# EAGLE board ppt4 (EAGLE 5.11)
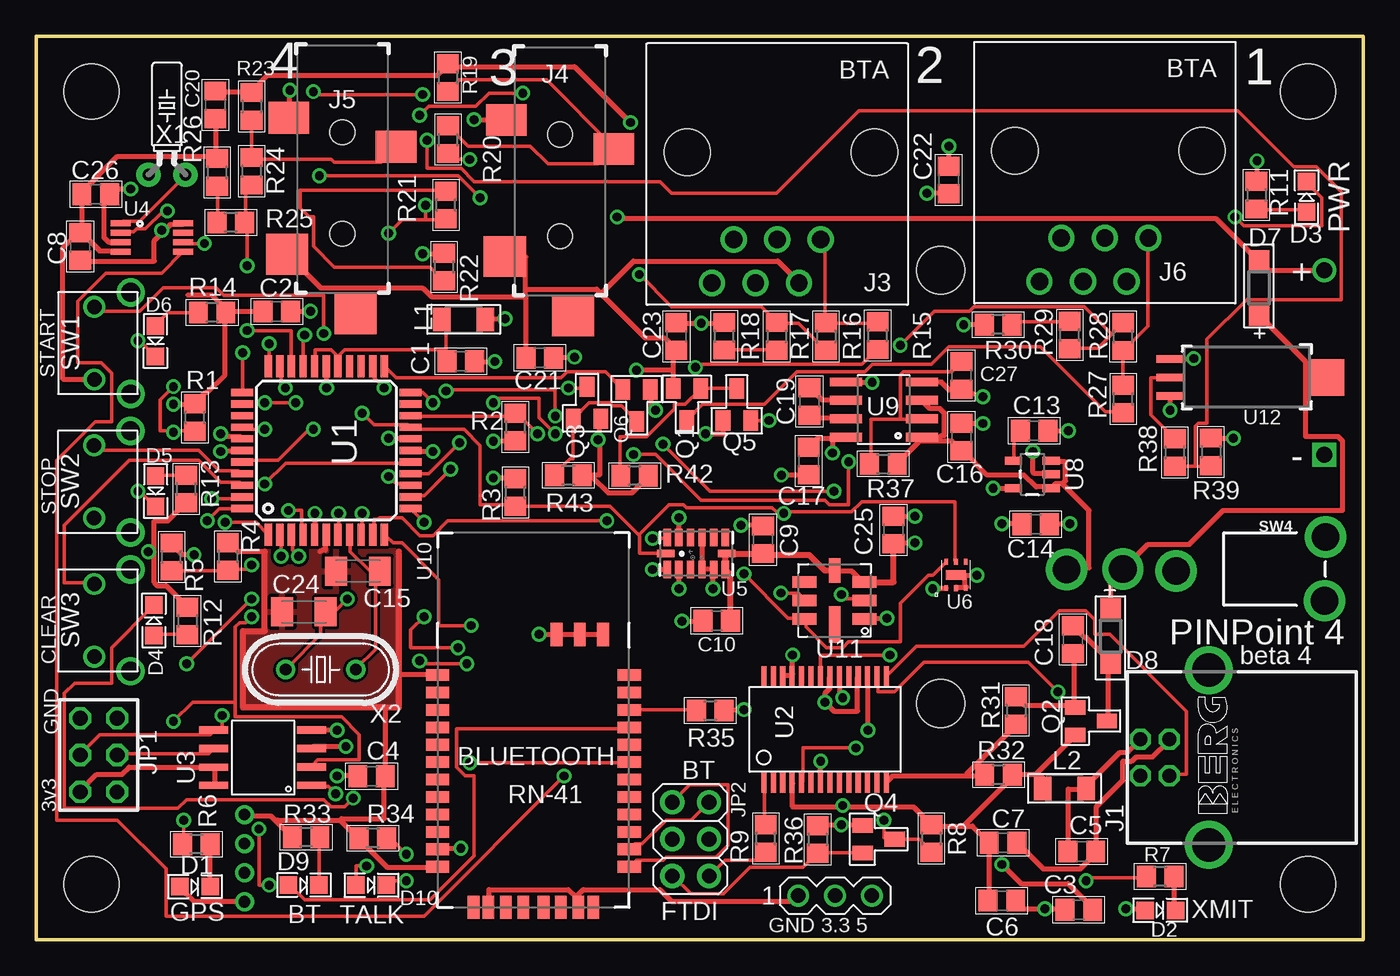
[diagram p0: board, top side]
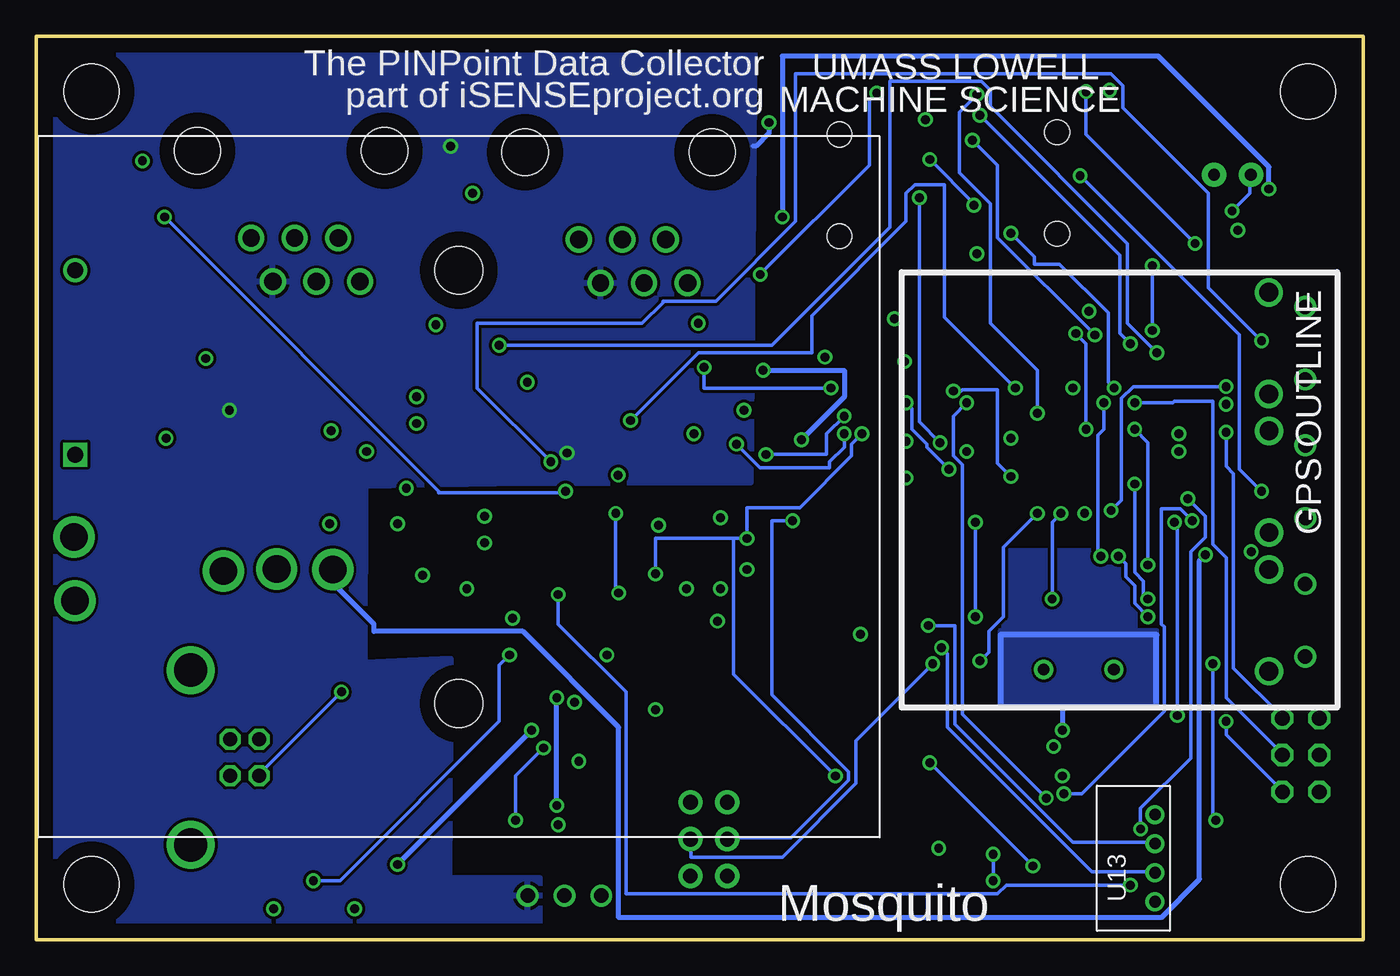
[diagram p1: board, bottom side, seen from below]

Size 91.44 x 62.23 mm. Coordinates in mm from the lower left corner, seen from the top.
Outline: 0,0 0,62.23 91.44,62.23 91.44,0 0,0
Copper layers (1*2+3*16): Top 0.035mm / dielectric 1.5mm / $gnd 0.035mm / dielectric 0.15mm / $+3v3 0.035mm / dielectric 0.2mm / Bottom 0.035mm
Design rules "default *": minimum track width 10mil, minimum drill 24mil, track to track 8mil, track to pad 8mil, pad to pad 8mil, via to via 8mil, smd to smd 8mil, copper to edge 40mil, drill to drill 8mil, minimum pad ring 10mil, minimum via ring 8mil, stop-mask expansion 4mil, vias tented up to drill 0mil, thermal gap 10mil
Net classes: 0 SIGNAL: width 0.203 mm, drill 0.203 mm, clearance 0.203 mm; 1 SUPPLY: width 0.356 mm, drill 0.203 mm, clearance 0.203 mm
Holes 3.81 mm at 3.81,3.81 3.81,58.42 87.63,3.81 87.63,58.42
tRestrict: area -0.2,-0.2 to 7.8,7.8; area -0.2,54.4 to 7.8,62.4; area 83.6,-0.2 to 91.6,7.8; area 83.6,54.4 to 91.6,62.4

## Footprints (pad centres in the part's own frame; a part is rotated, then mirrored left to right if it is on the bottom)
C0805 = smd 1.3 x 1.5: 1 -0.95,0; 2 0.95,0
C1206K = smd 1.5 x 2: 1 -1.5,0; 2 1.5,0
LED-0805 = smd 1.2 x 1.2: A 0,-1.05; C 0,1.05
SOD123 = smd 1.4 x 1.4: A 1.9,0; C -1.9,0
PN61729-S = drill 0.95 octagon: 1 1.25,4.71; 2 -1.25,4.71; 3 -1.25,2.71; 4 1.25,2.71 | drill 2.3 pad 2.9 round: S1 -6.02,0; S2 6.02,0
DY164 = drill 1.2 round: 1 4.5,3; 2 3,0; 3 1.5,3; 4 0,0; 5 -1.5,3; 6 -3,0 | hole 3.2: 6.2,-6; -6.7,-6
SJ-3534-SMT = smd 2.2 x 2.8: 1 0,-3.7; 3 2,3.7 | smd 2.8 x 2.9: 2 9.4,-3.8; 10 13.5,0.9 | hole 1.7: 1,0; 8,0
2464R = drill 1.1 square: NEG 26.42,2.225 | drill 1.1 round: POS 26.42,14.925 | hole 3.3: 0,14.925; 0,-14.925
AVR-ISP-6 = drill 1.016 octagon: 2 -2.54,1.27; 3 0,-1.27; 4 0,1.27; 5 2.54,-1.27; 6 2.54,1.27 | drill 1 octagon: P$1 -2.54,-1.27
2X03 = drill 1.016 pad 1.676 round: 2 -2.54,1.27; 3 0,-1.27; 4 0,1.27; 5 2.54,-1.27; 6 2.54,1.27 | drill 1 pad 1.676 round: P$2 -2.54,-1.27
L3216C = smd 1.2 x 1.6: 1 -1.5,0; 2 1.5,0
SUPER-SOT3 = smd 1 x 1.4: 1 -0.95,-1.1; 2 0.95,-1.1; 3 0,1.1
SOT23 = smd 1 x 1.4: 1 -0.95,-1.1; 2 0.95,-1.1; 3 0,1.1
R0805 = smd 1.3 x 1.5: 1 -0.95,0; 2 0.95,0
PTS635V = drill 1 round: 1 -2.5,0; 2 2.5,0 | drill 1.3 round: P$1 -3.5,2.5; P$2 3.5,2.5
102-1271-EV = drill 1.9 round: 1 -0.14,10.28; 2 0,13.96; 3 -0.03,17.82; P$1 2.2,0; P$2 -2.19,0.05
MA03-1 = drill 1 round: P$1 -2.54,0; P$2 0,0; P$3 2.54,0
TQFP44 = smd 1.5 x 0.5: 1 -5.8,4; 2 -5.8,3.2; 3 -5.8,2.4; 4 -5.8,1.6; 5 -5.8,0.8; 6 -5.8,0; 7 -5.8,-0.8; 8 -5.8,-1.6; 9 -5.8,-2.4; 10 -5.8,-3.2; 11 -5.8,-4; 23 5.8,-4; 24 5.8,-3.2; 25 5.8,-2.4; 26 5.8,-1.6; 27 5.8,-0.8; 28 5.8,0; 29 5.8,0.8; 30 5.8,1.6; 31 5.8,2.4; 32 5.8,3.2; 33 5.8,4 | smd 0.5 x 1.5: 12 -4,-5.8; 13 -3.2,-5.8; 14 -2.4,-5.8; 15 -1.6,-5.8; 16 -0.8,-5.8; 17 0,-5.8; 18 0.8,-5.8; 19 1.6,-5.8; 20 2.4,-5.8; 21 3.2,-5.8; 22 4,-5.8; 34 4,5.8; 35 3.2,5.8; 36 2.4,5.8; 37 1.6,5.8; 38 0.8,5.8; 39 0,5.8; 40 -0.8,5.8; 41 -1.6,5.8; 42 -2.4,5.8; 43 -3.2,5.8; 44 -4,5.8
SSOP28DB = smd 0.348 x 1.397: 1 -4.225,-3.656; 2 -3.575,-3.656; 3 -2.925,-3.656; 4 -2.275,-3.656; 5 -1.625,-3.656; 6 -0.975,-3.656; 7 -0.325,-3.656; 8 0.325,-3.656; 9 0.975,-3.656; 10 1.625,-3.656; 11 2.275,-3.656; 12 2.925,-3.656; 13 3.575,-3.656; 14 4.225,-3.656; 15 4.225,3.656; 16 3.575,3.656; 17 2.925,3.656; 18 2.275,3.656; 19 1.625,3.656; 20 0.975,3.656; 21 0.325,3.656; 22 -0.325,3.656; 23 -0.975,3.656; 24 -1.625,3.656; 25 -2.275,3.656; 26 -2.925,3.656; 27 -3.575,3.656; 28 -4.225,3.656
WSON = smd 2 x 0.5: CE# -3.29,1.595; HOLD# 3.46,0.345; SCK 3.46,-0.945; SI 3.46,-2.215; SO -3.29,0.325; VDD 3.46,1.595; VSS -3.29,-2.215; WP# -3.29,-0.945
UMAX-8 = smd 1.35 x 0.4: P$1 -2.15,0.975; P$2 -2.15,0.325; P$3 -2.15,-0.325; P$4 -2.15,-0.975; P$5 2.15,-0.975; P$6 2.15,-0.325; P$7 2.15,0.325; P$8 2.15,0.975
LGA14 = smd 0.5 x 1.2: 1 2,1.1; 2 1.2,1.1; 3 0.4,1.1; 4 -0.4,1.1; 5 -1.2,1.1; 6 -2,1.1; 8 -2,-1.1; 9 -1.2,-1.1; 10 -0.4,-1.1; 11 0.4,-1.1; 12 1.2,-1.1; 13 2,-1.1 | smd 1.2 x 0.5: 7 -2.1,0; 14 2.1,0
MAX44007 = smd 0.25 x 0.4: P1 -0.675,-0.9; P2 0,-0.925; P3 0.675,-0.9; P4 0.675,0.9; P5 0,0.9; P6 -0.675,0.9 | smd 1.35 x 0.65: PGND 0,0
SOT23-5 = smd 0.55 x 1.2: 1 -0.95,-1.3; 2 0,-1.3; 3 0.95,-1.3; 4 0.95,1.3; 5 -0.95,1.3
SO08 = smd 0.61 x 2.21: 1 -1.905,-2.616; 2 -0.635,-2.616; 3 0.635,-2.616; 4 1.905,-2.616; 5 1.905,2.616; 6 0.635,2.616; 7 -0.635,2.616; 8 -1.905,2.616
RN41 = smd 0.8 x 1.6: 1 -6.6,-6.6; 2 -5.4,-6.6; 3 -4.2,-6.6; 4 -3,-6.6; 5 -1.8,-6.6; 6 -0.6,-6.6; 7 0.6,-6.6; 8 1.8,-6.6; 9 3,-6.6; 10 4.2,-6.6; 11 5.4,-6.6; 12 6.6,-6.6; 13 6.6,6.6; 14 5.4,6.6; 15 4.2,6.6; 16 3,6.6; 17 1.8,6.6; 18 0.6,6.6; 19 -0.6,6.6; 20 -1.8,6.6; 21 -3,6.6; 22 -4.2,6.6; 23 -5.4,6.6; 24 -6.6,6.6 | smd 1.6 x 0.8: 25 -9.4,4.8; 26 -9.4,3.2; 27 -9.4,1.6; 28 9.4,3.1; 29 9.4,-3.1; 30 9.4,-4.122; 31 9.4,-1.9; 32 9.4,-0.7; 33 9.4,0.7; 34 9.4,1.9; 35 9.4,4.122
BMP085 = smd 1.67 x 0.8: 1 -2.065,1.27; 2 -2.065,0; 3 -2.065,-1.27; 5 2.065,-1.27; 6 2.065,0; 7 2.065,1.27 | smd 0.8 x 1.67: 4 0,-2.065 | smd 0.8 x 2.5: 8 0,1.65
HIH-4030 = smd 0.508 x 1.778: 1 -1.27,-5.08; 2 0,-5.08; 3 1.27,-5.08 | smd 2.54 x 2.286: NC 0,5.842
DF3A-4P-BACK = drill 0.8 round: P$1 3,0; P$2 1,0; P$3 -1,0; P$4 -3,0
TC26H = drill 0.813 pad 1.676 round: 1 -1.27,0; 2 1.27,0
HC49U-V = drill 0.813 round: 1 -2.413,0; 2 2.413,0

## Placement (x,y rotation side)
C1  0.1uF  [C0805]  29.26,39.84 0 top
C2  0.1uF  [C0805]  16.58,43.27 0 top
C3  0.1uF  [C0805]  71.84,2.07 180 top
C4  0.1uF  [C0805]  23.11,11.25 0 top
C5  0.01uF  [C0805]  72.05,6.07 0 top
C6  4.7uF C0805C475K9PACTU  [C0805]  66.54,2.69 0 top
C7  0.1uF  [C0805]  66.62,6.68 0 top
C8  0.1uF  [C0805]  3.03,47.75 90 top
C9  1uF  [C0805]  50.08,27.55 90 top
C10  0.1uF  [C0805]  46.9,21.96 180 top
C13  470pF  [C0805]  68.76,35.06 0 top
C14  2.2uF C0805C225Z4VACTU  [C0805]  68.87,28.61 0 top
C15  18pF  [C1206K]  22.17,25.39 180 top
C16  1uF  [C0805]  63.75,34.62 90 top
C17  2.2uF C0805C225Z4VACTU  [C0805]  53.23,32.98 270 top
C18  1uF  [C0805]  71.43,20.66 90 top
C19  0.47uF  [C0805]  53.27,37.07 90 top
C20  0.1uF  [C0805]  12.34,57.51 270 top
C21  0.1uF  [C0805]  34.7,40.08 0 top
C22  0.1uF  [C0805]  62.88,52.33 270 top
C23  0.1uF  [C0805]  44.11,41.55 90 top
C24  18pF  [C1206K]  18.44,22.58 180 top
C25  0.1uF  [C0805]  59.07,28.23 90 top
C26  10uF  [C0805]  4.1,51.34 180 top
C27  2.2uF  [C0805]  63.75,38.88 270 top
D1  GREEN 2 mA 0805  [LED-0805]  10.94,3.65 270 top
D2  YELLOW 2 mA 0805  [LED-0805]  77.45,2.02 270 top
D3  GREEN 2 mA 0805  [LED-0805]  87.54,51.17 0 top
D4  RED 2 mA 0805  [LED-0805]  8.1,22 0 top
D5  YELLOW 2 mA 0805  [LED-0805]  8.23,30.89 180 top
D6  GREEN 2 mA 0805  [LED-0805]  8.21,41.22 180 top
D7  MBR0520L  [SOD123]  84.25,44.91 90 top
D8  MBR0520L  [SOD123]  74.03,20.91 270 top
D9  YELLOW 2 mA 0805  [LED-0805]  18.43,3.76 270 top
D10  GREEN 2 mA 0805  [LED-0805]  23.08,3.75 270 top
J1  Digikey WM17113-ND  [PN61729-S]  80.8,12.55 90 top
J3  BTA  [DY164]  51.06,48.23 180 top
J4  SJ-3524-SMT  [SJ-3534-SMT]  36.08,56.46 270 top
J5  SJ-3524-SMT  [SJ-3534-SMT]  21.1,56.62 270 top
J6  BTA  [DY164]  73.63,48.34 180 top
J7  2464  [2464R]  62.33,31.19 0 top
JP1  AVR-ISP-6  [AVR-ISP-6]  4.3,12.72 90 top
JP2  [2X03]  45.09,6.93 90 top
L1  10uH CBC3225T100MR 1210 pkg  [L3216C]  29.45,42.73 180 top
L2  10uH CBC3225T100MR 1210 pkg  [L3216C]  70.86,10.42 0 top
Q1  NDS332P  [SUPER-SOT3]  44.84,36.87 180 top
Q2  NDS332P  [SUPER-SOT3]  72.68,15.06 270 top
Q3  NDS332P  [SUPER-SOT3]  37.95,36.98 0 top
Q4  BSS128  [SOT23]  58.05,6.92 270 top
Q5  BSS123  [SOT23]  48.27,36.87 0 top
Q6  BSS123  [SOT23]  41.37,36.81 180 top
R1  10K  [R0805]  10.94,35.97 90 top
R2  10K  [R0805]  33.01,35.31 270 top
R3  10K  [R0805]  33.02,30.81 90 top
R4  47K  [R0805]  13.21,26.4 270 top
R5  47K  [R0805]  9.32,26.37 90 top
R6  1K  [R0805]  11.03,6.57 180 top
R7  1K  [R0805]  77.43,4.35 180 top
R8  10K  [R0805]  61.68,6.97 270 top
R9  10K  [R0805]  50.27,6.97 90 top
R11  1K  [R0805]  84.08,51.28 270 top
R12  1K  [R0805]  10.42,21.95 270 top
R13  1K  [R0805]  10.34,31.04 90 top
R14  1K  [R0805]  12.12,43.2 180 top
R15  47K  [R0805]  57.98,41.61 90 top
R16  47K  [R0805]  54.42,41.55 270 top
R17  47K  [R0805]  51.02,41.56 270 top
R18  47K  [R0805]  47.41,41.57 90 top
R19  47K  [R0805]  28.36,59.38 270 top
R20  47K  [R0805]  28.37,55.11 270 top
R21  47K  [R0805]  28.23,50.61 90 top
R22  47K  [R0805]  28.11,46.33 90 top
R23  47K  [R0805]  14.85,57.41 270 top
R24  47K  [R0805]  14.84,52.93 270 top
R25  47K  [R0805]  13.42,49.4 180 top
R26  47K  [R0805]  12.47,52.86 90 top
R27  47K  [R0805]  74.9,37.24 90 top
R28  47K  [R0805]  74.89,41.54 90 top
R29  47K  [R0805]  71.21,41.65 90 top
R30  47K  [R0805]  66.28,42.36 180 top
R31  1K  [R0805]  67.51,15.78 270 top
R32  10K  [R0805]  66.3,11.36 180 top
R33  1K  [R0805]  18.6,7.06 180 top
R34  1K  [R0805]  23.18,6.99 180 top
R35  10K  [R0805]  46.44,15.79 0 top
R36  10K  [R0805]  53.85,6.91 270 top
R37  100K  [R0805]  58.37,32.77 0 top
R38  P12.0KCCT-ND  [R0805]  78.46,33.56 90 top
R39  P68.0KCCT-ND  [R0805]  80.95,33.61 270 top
R42  10K  [R0805]  41.23,31.96 180 top
R43  10K  [R0805]  36.65,31.99 180 top
SW1  PTS635V  [PTS635V]  4,41.09 270 top
SW2  PTS635V  [PTS635V]  3.99,31.55 270 top
SW3  PTS635V  [PTS635V]  4,22 270 top
SW4  EG2480  [102-1271-EV]  88.83,25.53 90 top
TP1  [MA03-1]  55.04,3.03 0 top
U1  ATMEGA324PV-10AU  [TQFP44]  19.99,33.7 90 top
U2  FT232RL  [SSOP28DB]  54.36,14.48 0 top
U3  SST25VF016BTRUE  [WSON]  15.7,12.23 180 top
U4  DS1340U-33+  [UMAX-8]  7.97,48.37 0 top
U5  ADXL345  [LGA14]  45.48,26.6 180 top
U6  MAX44007  [MAX44007]  63.38,25.12 0 top
U8  MIC5205-3.3YM5  [SOT23-5]  68.63,32.06 90 top
U9  MAX682  [SO08]  58.4,36.52 90 top
U10  BLUETOOTH-RN41"  [RN41]  34.26,11.63 270 top
U11  BMP085  [BMP085]  55.01,23.37 180 top
U12  HIH-4031SMD  [HIH-4030]  83.16,38.72 270 top
U13  LS20031  [DF3A-4P-BACK]  14.34,5.61 270 top
X1  32.768 kHz 12.5 pF X1123-ND  [TC26H]  9.01,52.69 0 top
X2  9.216 MHZ 18PF  [HC49U-V]  19.61,18.61 180 top

## Library data of the parts
C1-C10 C13-C27 L1 L2 R1-R9 R11-R39 R42 R43 = rcl
D1-D6 D9 D10 JP1 SW1-SW4 U3 U13 = machine_science
D7 D8 = diode
J1 = con-berg
J3-J7 U6 = machine_science2
JP2 = pinhead
Q1-Q3 = transistor-power
Q4-Q6 = transistor-small-signal
TP1 = con-lstb
U1 = atmel
U2 = SparkFunEagle-6-6-07
U4 U5 U8 U10 X1 = SparkFun
U9 = max682
U11 U12 = SparkFun-20100301
X2 = crystal

## Nets
+3V3 [SUPPLY]: C2.1 C4.1 C8.1 C9.1 C10.1 C14.1 C25.1 D1.A D2.A JP1.2 L1.1 Q4.1 Q5.1 Q6.1 R1.2 R2.2 R3.2 R11.1 R12.1 R13.1 R14.1 R36.1 TP1.P$2 U1.5 U1.17 U1.38 U3.HOLD# U3.VDD U3.WP# U4.P$8 U5.1 U5.6 U5.7 U6.P1 U8.5 U10.11 U11.3 U11.4 U13.P$1
+5V [SUPPLY]: C17.1 C20.1 C21.1 C22.1 C23.1 J3.5 J4.2 J5.2 J6.5 Q1.2 Q3.2 R19.1 R23.1 R42.1 R43.1 TP1.P$3 U9.8 U12.3
ADX1: R28.2 R29.1 U1.34
ADX1-PULLUP: Q5.2 U1.24
ADX2: R16.2 R17.1 U1.33
ADX2-PULLUP: Q6.2 U1.23
ADX3: R20.2 R21.1 U1.32
ADX4: R24.2 R25.1 U1.31
ATM-RX0: JP2.3 U1.9
ATM-TX0: JP2.4 U1.10
BATT-LED: D3.C U1.13
CLEAR-BUTTON: SW3.1 U1.42
CLEAR-LED: D4.C U1.22
CS: U1.44 U3.CE#
EOC: U1.43 U11.2
FTDI-RX: JP2.2 Q4.2 R36.2
FTDI-TX: JP2.P$2 R9.1
FTDI-VCC [SUPPLY]: C6.1 C7.1 L2.1 Q2.2 R8.1 R32.1 U2.4 U2.20
GND [SUPPLY]: C1.2 C2.2 C3.2 C4.2 C5.2 C6.2 C7.2 C8.2 C9.2 C10.2 C13.2 C14.2 C15.2 C16.2 C17.2 C20.2 C21.2 C22.2 C23.2 C24.2 C25.2 C26.2 C27.2 J1.4 J3.2 J4.1 J5.1 J6.2 J7.NEG JP1.6 R4.1 R18.2 R22.2 R26.2 R30.2 R33.2 R34.2 R35.2 R39.1 SW1.2 SW2.2 SW3.2 TP1.P$1 U1.6 U1.18 U1.28 U1.39 U2.7 U2.18 U2.21 U2.25 U2.26 U3.VSS U4.P$4 U5.2 U5.4 U5.5 U5.10 U5.12 U6.P2 U6.P3 U6.PGND U8.2 U9.4 U9.5 U10.1 U10.12 U10.25 U10.26 U10.27 U10.28 U10.29 U11.1 U12.1 U13.P$4
GPS-LED: R6.2 U1.16
HUMIDITY: R38.1 R39.2 U1.30
MISO: JP1.P$1 U1.2 U3.SO
MOSI: JP1.4 U1.1 U3.SI
N$1: J1.2 U2.16
N$2: J1.3 U2.15
N$3: C1.1 L1.2 U1.27 U1.29
N$4: R38.2 U12.2
N$5: D9.C R33.1
N$6: D3.A R11.2
N$7 [SUPPLY]: C5.1 J1.1 L2.2
N$8 [SUPPLY]: D1.C R6.1
N$9: R7.2 U2.22
N$10 [SUPPLY]: D2.C R7.1
N$11: Q4.3 R8.2 U2.5
N$12: R9.2 U2.1
N$13 [SUPPLY]: C3.1 U2.17
N$14: U4.P$1 X1.2
N$15: U4.P$2 X1.1
N$16: D4.A R12.2
N$17: D5.A R13.2
N$18: D6.A R14.2
N$19: J3.6 R15.2 R16.1
N$20: J6.6 R27.2 R28.1
N$21: R17.2 R18.1
N$22: J4.3 R19.2 R20.1
N$23: R29.2 R30.1
N$24: R21.2 R22.1
N$25: J5.3 R23.2 R24.1
N$26: C13.1 U8.4
N$27: R25.2 R26.1
N$28 [SUPPLY]: C19.1 U9.7
N$29 [SUPPLY]: C18.1 Q2.1 R31.1
N$30 [SUPPLY]: C19.2 U9.6
N$31 [SUPPLY]: C18.2 D8.A Q2.3
N$32: Q1.3 R27.1
N$33: C24.1 U1.7 X2.2
N$34: C27.1 R37.1 U9.2
N$35: C15.1 U1.8 X2.1
N$36: D9.A U10.21
N$37: D10.C R34.1
N$38: D10.A U10.19
N$39: R35.1 U10.22
N$40: Q1.1 Q5.3 R42.2
N$41: Q3.3 R15.1
N$42: Q3.1 Q6.3 R43.2
PWREN~ [SUPPLY]: R31.2 R32.2 U2.14
RST: JP1.5 R1.1 U1.4
RX1: U1.11 U13.P$3
RX-BT: JP2.5 U10.14
SCK: JP1.3 U1.3 U3.SCK
SCL: R3.1 U1.19 U4.P$6 U5.14 U6.P5 U11.6
SDA: R2.1 U1.20 U4.P$5 U5.13 U6.P6 U11.7
START-BUTTON: SW1.1 U1.40
START-LED: D6.C U1.14
STOP-BUTTON: SW2.1 U1.41
STOP-LED: D5.C U1.15
TX1: U1.12 U13.P$2
TX-BT: JP2.6 U10.13
UNSWPWR [SUPPLY]: D7.C D8.C SW4.2
VBATT [SUPPLY]: C26.1 D7.A J7.POS U4.P$3
VINPUT [SUPPLY]: C16.1 R5.2 R37.2 SW4.3 U8.1 U8.3 U9.1 U9.3
VOLT: R4.2 R5.1 U1.37

## Tracks (layer width: path | path; a pad name or v marks a point on that pad's centre or on a via)
+3V3  (via drill 0.61)
  Top 0.356: 8.74,48.77 8.13,48.16 8.13,46.74 3.05,46.74 C8.1 | 8.74,48.77 9.25,49.28 10.06,49.28 U4.P$8 | R14.1 13.01,43.18 13.01,38.91 11.79,37.69 11.68,37.69 10.97,36.98 R1.2 10.77,36.88 v9.45,36.88 | C2.1 15.54,43.28 13.21,43.28 R14.1 | 10.46,44.4 12.09,44.4 13.11,43.38 R14.1 | 8.13,26.72 8.13,28.85 9.04,28.85 10.26,30.07 R13.1 | 8.13,26.72 8.13,24.59 8.33,24.38 8.94,24.38 10.36,22.96 R12.1 | Q4.1 56.9,7.92 v55.47,7.92 53.95,7.92 R36.1 | U3.VDD 12.29,10.67 12.29,11.79 U3.HOLD# 12.09,11.89 6.4,11.89 5.89,11.38 4.17,11.38 3.05,10.26 JP1.2 | D1.A 9.96,3.56 10.87,2.64 14.33,2.64 U13.P$1 | v75.08,2.13 76.2,2.13 76.3,2.03 D2.A | v20.73,11.28 22.15,11.28 C4.1 | v12.7,34.85 12.9,34.65 14.02,34.65 14.12,34.54 U1.38 | v84.12,53.65 84.12,52.32 R11.1 | v29.26,6.3 27.74,6.3 U10.11 | v21.34,13.31 19.1,13.31 19,13.21 U3.WP# | 8.13,26.72 v7.72,26.72 | 8.74,48.77 v8.64,48.87 | v65.94,31.09 67.26,31.09 U8.5 | v32.31,42.77 30.99,42.77 L1.1 | v42.67,36.47 42.47,36.68 42.37,36.68 42.37,37.9 Q6.1 | v46.13,34.85 47.35,34.85 47.35,35.76 Q5.1 | v27.33,33.63 25.81,33.63 U1.17 | v19.2,29.36 19.2,27.94 U1.5 | v31.5,31.8 32.92,31.8 R3.2 | v31.5,34.34 32.92,34.34 R2.2 | v61.77,24.18 62.69,24.18 U6.P1 | v66.55,28.65 67.87,28.65 C14.1 | U11.3 56.9,24.69 56.19,25.4 55.17,25.4 U11.4 | v42.47,25.5 43.38,25.5 U5.1 | v60.55,27.33 59.23,27.33 C25.1
  Top 0.406: U11.3 59.07,24.64 C25.1 | U11.4 54.32,25.43 53.25,26.5 50.18,26.5 C9.1 U5.7 47.48,26.5 U5.6 47.84,25.13 C10.1
+5V  (via drill 0.61)
  Top 0.356: C20.1 12.39,58.42 14.83,58.42 R23.1 14.94,58.52 15.95,59.54 27.64,59.54 28.35,60.25 R19.1 28.45,60.15 37.08,60.15 v40.95,56.29 | 33.73,44.81 33.73,47.04 32.31,47.04 J4.2 | 33.73,44.3 33.73,44.81 | 33.73,44.3 33.73,40.13 C21.1 | 38.91,44.5 38.61,44.81 33.73,44.81 | 38.91,44.5 41.96,41.45 43.28,41.45 44.09,40.64 C23.1 43.89,40.64 43.89,39.22 | J5.2 17.37,47.14 19.61,44.91 26.62,44.91 27.23,44.3 33.73,44.3 | C17.1 53.85,34.54 55.78,34.54 U9.8 54.86,34.44 v54.86,33.53 | v62.89,54.66 62.89,53.34 C22.1 | v78.13,36.47 78.13,37.39 U12.3 | 38.91,44.5 41.15,46.74 51.1,46.74 52.53,45.31 J3.5 | 43.89,39.22 43.89,38 Q1.2 | 38.81,34.44 38.81,32 38.3,32 | 38.81,34.44 38.81,35.87 Q3.2 | 38.3,32 37.69,32 R43.1 | R42.1 42.16,31.9 41.05,30.79 39.42,30.79 38.3,31.9 38.3,32 | 43.89,39.22 v41.35,39.22 | v38.71,34.44 38.81,34.44
  Bottom 0.356: v40.95,56.29 40.95,55.58 41.86,54.66 42.03,54.66 | v41.35,39.22 35.76,39.22 35.76,37.39 v38.71,34.44
  pour Bottom: 41.96,62.24 42.21,31.48 59.88,31.41 68.78,31.24 68.81,19.13 62.9,19.38 63,4.25 56.75,4.25 56.75,0 91.26,0 91.26,62.24
ADX1  (via drill 0.61)
  Top 0.254: 74.12,41.71 73.15,40.74 71.32,40.74 R29.1 | 74.12,41.71 74.88,42.47 R28.2 | v14.22,40.44 14.22,37.8 U1.34 | v59.54,40.95 61.87,43.28 64.31,43.28 64.62,43.59 72.24,43.59 74.12,41.71
  Bottom 0.254: v14.22,40.44 16.26,42.47 16.26,47.95 25.7,57.4 25.7,58.52 26.31,59.13 32.61,59.13 32.61,49.07 40.74,40.95 v59.54,40.95
ADX1-PULLUP  (via drill 0.61)
  Top 0.254: v50.49,35.76 49.28,35.76 Q5.2 | v23.98,38 23.27,38.71 23.27,39.42 U1.24
  Bottom 0.254: v50.49,35.76 45.82,40.44 38,40.44 38,42.98 31.5,49.48 31.5,51.41 30.89,52.02 28.85,52.02 28.85,42.88 v23.98,38
ADX2  (via drill 0.61)
  Top 0.254: v16.05,41.05 16.05,39.52 U1.33 | v26.42,56.79 27.03,57.4 30.28,57.4 31.19,58.32 v33.53,58.32 | v41.55,45.82 43.79,43.59 49.99,43.59 51,42.57 R17.1 51.1,42.47 52.53,42.47 54.36,40.64 R16.2
  Bottom 0.254: v16.05,41.05 16.76,41.76 16.76,47.14 v26.42,56.79 | v33.53,58.32 34.04,57.81 34.04,53.34 v41.55,45.82
ADX2-PULLUP
  Top 0.254: Q6.2 40.34,38 39.22,39.12 36.58,39.12 36.17,38.71 24.79,38.71 24.08,39.42 U1.23
ADX3  (via drill 0.61)
  Top 0.254: v17.17,38 16.87,38 16.87,39.42 U1.32 | v24.28,48.67 25.2,49.58 26.82,49.58 | 26.82,49.58 28.14,49.58 R21.1 | v29.87,53.75 28.85,53.75 28.45,54.15 R20.2 | 26.82,49.58 v26.82,50.6
  Bottom 0.254: v17.17,38 17.58,38.41 17.58,43.18 20.93,46.53 22.66,46.53 22.66,47.04 v24.28,48.67 | v29.87,53.75 26.82,50.7 v26.82,50.6
ADX4  (via drill 0.61)
  Top 0.254: R24.2 14.83,51.92 14.43,51.92 14.43,49.48 R25.1 14.33,49.28 14.53,49.28 v14.53,46.43 | v14.53,41.96 17.58,41.96 17.58,39.52 U1.31
  Bottom 0.254: v14.53,41.96 v14.53,46.43
ATM-RX0  (via drill 0.61)
  Top 0.254: v22.45,29.36 22.45,27.94 U1.9 | v26.42,19.2 26.62,19 v29.67,19
  Bottom 0.254: v22.45,29.36 24.79,27.03 24.79,22.25 25.81,21.23 25.81,19.81 v26.42,19.2 | v29.67,19 34.95,13.72 34.95,10.77 40.03,5.69 46.33,5.69 46.33,6.91 JP2.3
ATM-TX0  (via drill 0.61)
  Top 0.254: v39.32,28.85 28.35,28.85 27.33,27.84 26.42,27.84 25.2,29.06 23.67,29.06 23.57,28.96 23.27,28.96 23.27,27.94 U1.10
  Bottom 0.254: v39.32,28.85 40.74,28.85 40.74,16.87 35.46,11.58 35.46,10.97 39.42,7.01 43.79,7.01 JP2.4
BATT-LED  (via drill 0.61)
  Top 0.254: v82.6,49.78 83.21,49.17 88.59,49.17 88.59,51.1 87.58,52.12 D3.C | v54.97,30.89 46.43,30.89 v43.18,34.14 | v35.76,34.85 34.65,35.97 34.65,37.29 31.8,37.29 v31.5,36.98 | v28.55,32.41 26.72,30.58 25.81,30.58 U1.13
  Bottom 0.254: v54.97,30.89 54.97,30.79 63.7,30.79 63.7,30.89 v82.6,49.78 | v43.18,34.14 41.55,32.51 36.78,32.51 36.78,32.92 35.76,33.93 v35.76,34.85 | v31.5,36.98 31.09,36.58 31.09,35.15 30.07,34.14 30.07,33.93 v28.55,32.41
CLEAR-BUTTON
  Top 0.254: U1.42 14.12,31.39 14.02,31.5 12.7,31.5 11.18,33.02 6.4,33.02 1.93,28.55 1.93,24.59 3.96,24.59 SW3.1
CLEAR-LED  (via drill 0.61)
  Top 0.254: v21.84,9.75 21.23,9.14 20.32,9.14 19.81,9.65 10.36,9.65 9.75,9.04 1.93,9.04 1.93,16.97 2.64,17.68 5.18,17.68 5.18,20.12 8.03,22.96 D4.C | v27.33,36.98 26.62,37.69 25.81,37.69 U1.22
  Bottom 0.254: v21.84,9.75 27.64,15.54 27.64,32.72 28.25,33.33 28.25,36.07 v27.33,36.98
CS  (via drill 0.61)
  Top 0.254: v11.79,28.85 12.6,29.67 14.12,29.67 U1.44 | v20.62,10.06 20.12,10.57 19,10.57 U3.CE#
  Bottom 0.254: v11.79,28.85 12.6,29.67 13.92,29.67 13.92,21.74 13.72,21.54 13.72,15.75 19.41,10.06 v20.62,10.06
EOC  (via drill 0.61)
  Top 0.254: v12.09,30.38 14.02,30.38 14.12,30.48 U1.43 | v15.34,7.62 15.34,3.76 v16.05,3.76 | v55.47,23.77 55.78,23.47 57,23.47 U11.2
  Bottom 0.254: v12.09,30.38 10.87,29.16 10.87,27.74 11.89,26.72 11.89,12.5 15.34,9.04 v15.34,7.62 | v16.05,3.76 24.59,3.76 25.2,3.15 50.8,3.15 50.8,17.07 55.47,21.74 v55.47,23.77
FTDI-RX
  Top 0.254: Q4.2 56.9,5.99 53.95,5.99 R36.2 53.75,5.89 52.83,4.98 49.17,4.98 47.35,3.15 45.11,3.15 43.89,4.37 JP2.2
FTDI-TX
  Top 0.254: R9.1 50.19,5.99 49.68,5.49 47.45,5.49 46.43,4.47 JP2.P$2
FTDI-VCC  (via drill 0.61)
  Top 0.356: 68.89,11.38 71.53,14.02 Q2.2 | 68.89,11.38 67.26,11.38 R32.1 67.26,11.18 64.01,7.92 64.01,7.82 | L2.1 69.29,10.46 69.29,11.28 68.99,11.28 68.89,11.38 | C6.1 65.63,2.74 65.63,6.6 C7.1 65.53,6.81 64.52,7.82 64.01,7.82 | 55.58,9.14 60.45,9.14 R8.1 61.77,7.82 64.01,7.82 | 55.58,9.14 52.12,9.14 52.12,10.77 U2.4 | v55.58,16.66 55.37,16.66 55.37,18.09 U2.20 | 55.58,9.14 v55.58,9.25
  Bottom 0.356: v55.58,9.25 v55.58,16.66
GND  (via drill 0.61)
  Top 0.356: R4.1 13.31,27.33 13.92,26.72 15.75,26.72 | U1.6 19.91,27.84 19.91,26.82 19.71,26.82 19.53,26.74 | 24.08,16 24.08,11.28 C4.2 23.98,11.18 23.98,8.33 21.03,8.33 20.93,8.23 | U10.1 27.64,18.29 25,18.29 | U2.26 51.51,18.19 52.02,18.19 U2.25 52.12,18.29 v52.12,19.61 | C20.2 12.39,56.49 12.39,53.85 R26.2 12.29,53.95 5.59,53.95 3.15,51.51 C26.2 3.15,51.31 3.15,48.87 3.05,48.87 C8.2 | U4.P$4 5.79,47.35 5.69,47.45 4.37,47.45 3.15,48.67 3.05,48.67 C8.2 | 37.19,2.95 37.29,2.85 37.29,2.23 U10.28 | 37.19,2.95 36.68,3.45 31.19,3.45 31.19,2.23 U10.29 | C7.2 67.67,6.6 69.39,4.88 71.93,4.88 73.05,5.99 C5.2 73.05,6.2 73.05,9.14 74.88,10.97 74.88,12.29 75.49,12.29 75.79,12.6 76.91,12.6 78.03,13.72 J1.4 | C6.2 67.56,2.64 68.07,2.13 v69.49,2.13 70.81,2.13 C3.2 | C23.2 44.2,42.47 v45.82,42.47 47.35,42.47 R18.2 | v54.05,12.29 54.05,10.87 U2.7 | 16.56,8.13 16.15,8.53 14.43,8.53 U13.P$4 | 16.56,8.13 17.58,7.11 R33.2 | v12.7,33.63 14.12,33.63 U1.39 | 20.93,8.23 22.15,7.01 R34.2 22.25,6.81 22.35,6.81 24.18,4.98 27.64,4.98 U10.12 | 20.93,8.23 16.66,8.23 16.56,8.13 | v26.62,47.24 28.04,47.24 R22.2 | v34.65,21.03 35.76,21.03 U10.27 35.97,21.03 37.29,21.03 U10.26 37.49,21.03 38.91,21.03 U10.25 | v20.73,14.43 19,14.43 U3.VSS | v17.48,58.52 17.48,56.69 J5.1 | v30.18,56.49 32.31,56.49 J4.1 | 37.19,2.95 37.69,3.45 42.98,3.45 43.79,2.64 52.12,2.64 52.43,2.95 TP1.P$1 | C8.2 2.85,48.67 1.83,47.65 1.83,38.61 3.96,38.61 SW1.2 | v60.55,29.16 59.13,29.16 C25.2 | v58.62,22.15 57.1,22.15 U11.1 | v68.68,33.63 68.68,32.21 68.78,32.11 69.9,32.11 U8.2 | v31.6,39.83 30.28,39.83 C1.2 | v51.34,32 53.14,32 C17.2 | v71.12,35.05 69.8,35.05 C13.2
  Top 0.356: v63.91,42.37 R30.2 | v82.5,34.54 80.97,34.54 R39.1 | v61.37,51.41 62.79,51.41 C22.2 | v79.76,40.03 78.13,40.03 U12.1 | v57.61,38.41 55.88,38.41 U9.5 | v37.08,40.13 35.66,40.13 C21.2 | v20.02,38 20.02,39.42 U1.28 | v24.28,34.54 25.7,34.54 U1.18 | v18.9,43.28 17.58,43.28 C2.2 | v71.22,28.65 69.9,28.65 C14.2 | v65.23,37.4 63.8,37.9 C27.2 63.6,37.9 62.89,37.9 62.38,38.41 61.06,38.41 U9.4 | v65.23,35.56 63.8,35.56 C16.2 | 64.01,24.38 63.91,24.28 63.4,24.28 U6.P2 | 64.01,24.38 64.11,24.28 U6.P3 | 64.01,25.09 63.4,25.09 U6.PGND | 64.01,24.38 64.01,25.09 | U2.21 54.66,18.09 54.66,17.27 54.36,16.97 v54.36,16.36 54.97,15.75 56.59,15.75 56.59,18.09 U2.18 | 64.01,25.09 v64.82,25.09 | v48.77,15.85 47.45,15.85 R35.2 | U5.10 45.92,27.64 45.92,25.6 U5.4 45.92,25.5 46.53,25.5 46.63,25.6 46.74,25.5 U5.5 46.63,25.4 v46.63,24.18 | v44.3,24.18 44.3,25.4 U5.2 | v44.3,29.06 44.3,27.74 U5.12 | v44.5,21.95 45.92,21.95 C10.2 | v48.56,28.55 49.99,28.55 C9.2
  Top 0.406: 15.75,26.75 15.75,26.72 15.75,21.25 14.25,21.25 14.25,16 24.08,16 25,16 25,18.29 25,26.75
  Bottom 0.356: 20.73,16 v20.73,14.43
  Bottom 0.406: 14.25,21 25,21 25,16 20.73,16 14.25,16 14.25,21
  pour Top: 15.75,26.75 15.75,21.25 14.25,21.25 14.25,16 25,16 25,21.25 24.75,21.25 24.75,26.75
  pour Bottom: 15.75,26.75 24.75,26.75 24.75,21.25 25,21.25 25,16 14.25,16 14.25,21.25 15.75,21.25
GPS-LED  (via drill 0.61)
  Top 0.254: v10.16,8.23 10.16,6.6 R6.2 | v10.36,19 v14.83,23.47 | v15.75,31.39 17.17,32.82 25.7,32.82 U1.16
  Bottom 0.254: v10.16,8.23 10.36,8.43 v10.36,19 | v14.83,23.47 15.14,23.77 15.14,24.69 15.75,25.3 v15.75,31.39
HUMIDITY  (via drill 0.61)
  Top 0.254: 79.86,32.61 80.87,32.61 R39.2 | 79.86,32.61 78.54,32.61 R38.1 | v18.49,41.66 18.39,41.66 18.39,39.52 U1.30 | v26.92,55.07 26.92,53.14 29.26,53.14 30.18,52.22 42.98,52.22 43.79,51.41 51,51.41 56.69,57.1 82.8,57.1 86.67,53.24 88.19,53.24 89.92,51.51 89.92,44.09 83.41,44.09 80.67,41.35 80.67,35.56 80.06,35.56 79.86,35.36 79.86,32.61
  Bottom 0.254: v18.49,41.66 25.2,48.36 25.2,53.34 v26.92,55.07
MISO  (via drill 0.61)
  Top 0.254: v16.87,26.42 16.87,27.84 U1.2 | v14.83,22.25 14.43,21.84 14.02,21.84 13.72,21.54 13.72,16.36 | 13.72,16.36 13.72,15.34 21.03,15.34 22.25,14.12 22.25,12.39 19.41,12.39 19,11.99 U3.SO | v9.45,15.04 10.77,16.36 13.72,16.36
  Bottom 0.254: v16.87,26.42 16.36,25.91 16.36,24.99 15.75,24.38 15.75,23.16 v14.83,22.25 | v9.45,15.04 9.45,14.12 5.59,10.26 JP1.P$1
MOSI  (via drill 0.61)
  Top 0.254: v13.01,28.75 15.14,28.75 15.95,27.94 U1.1 | v12.8,15.44 12.8,14.53 12.29,14.53 U3.SI 12.19,14.33 11.99,14.12 4.37,14.12 3.05,12.8 JP1.4
  Bottom 0.254: v13.01,28.75 12.8,28.55 v12.8,15.44
N$1  (via drill 0.61)
  Top 0.254: v70.41,17.07 68.38,19.1 61.16,19.1 59.13,17.07 58.01,17.07 58.01,18.09 U2.16
  Bottom 0.254: v70.41,17.07 76,11.48 76,11.38 J1.2
N$2
  Top 0.254: U2.15 58.62,18.19 60.66,20.22 68.07,20.22 70.51,22.66 72.34,22.66 72.95,22.05 72.95,21.03 73.97,21.03 79.25,15.75 79.25,11.38 78.13,11.38 J1.3
N$3
  Top 0.254: U1.29 19.2,39.52 19.2,40.64 20.32,40.64 20.73,40.23 20.73,39.52 U1.27 20.83,40.23 21.23,40.64 28.25,40.64 | 28.25,40.64 28.25,42.67 28.04,42.67 L1.2 | 28.25,40.64 28.25,39.93 C1.1
N$4
  Top 0.254: R38.2 78.44,34.54 76.81,36.17 76.81,38.71 78.03,38.71 U12.2
N$5
  Top 0.254: D9.C 19.51,3.86 19.51,7.01 R33.1
N$6
  Top 0.254: D3.A 87.48,50.19 87.38,50.29 84.12,50.29 R11.2
N$7
  Top 0.356: C5.1 71.12,6.1 71.12,10.36 72.34,10.36 L2.2 72.34,10.57 74.68,12.9 75.18,12.9 76,13.72 J1.1
N$8
  Top 0.356: D1.C 11.99,6.5 R6.1
N$9  (via drill 0.61)
  Top 0.254: v58.83,19.61 54.05,19.61 54.05,18.19 U2.22 | v72.34,4.06 72.54,4.27 76.4,4.27 R7.2
  Bottom 0.254: v58.83,19.61 59.54,18.9 59.54,15.04 70.51,4.06 v72.34,4.06
N$10
  Top 0.356: D2.C 78.44,2.03 78.44,4.27 R7.1
N$11  (via drill 0.61)
  Top 0.254: v56.49,13.21 52.83,13.21 52.83,10.87 U2.5 | v58.42,8.23 58.42,7.01 59.13,7.01 Q4.3 59.23,6.91 60.86,6.91 61.67,6.1 R8.2
  Bottom 0.254: v56.49,13.21 58.42,11.28 v58.42,8.23
N$12
  Top 0.254: U2.1 50.19,10.77 50.19,7.92 R9.2
N$13  (via drill 0.61)
  Top 0.356: v57.3,14.43 57.3,18.09 U2.17 | v66.55,5.18 67.87,3.86 71.12,3.86 72.85,2.13 C3.1
  Bottom 0.356: v57.3,14.43 v66.55,5.18
N$14
  Top 0.254: U4.P$1 5.89,49.38 5.99,49.48 7.11,49.48 10.26,52.63 X1.2
N$15  (via drill 0.61)
  Top 0.254: v9.04,50.19 8.74,50.19 7.52,48.97 6.91,48.97 6.71,48.77 5.89,48.77 U4.P$2
  Bottom 0.254: v9.04,50.19 7.82,51.41 7.82,52.63 X1.1
N$16
  Top 0.254: D4.A 8.13,21.03 10.36,21.03 R12.2
N$17
  Top 0.254: D5.A 8.23,32 10.26,32 R13.2
N$18
  Top 0.254: D6.A 8.23,42.37 9.04,43.18 11.07,43.18 R14.2
N$19
  Top 0.254: R15.2 57.91,42.47 54.46,42.47 R16.1 54.36,42.57 54.36,48.16 54.15,48.16 J3.6
N$20
  Top 0.254: R27.2 74.88,38.2 74.88,40.54 R28.1 74.98,40.64 76.61,42.27 76.61,48.26 J6.6
N$21
  Top 0.254: R17.2 51,40.64 47.45,40.64 R18.1
N$22
  Top 0.254: R20.1 28.45,55.98 29.77,54.66 34.04,54.66 35.26,53.44 38.71,53.44 39.73,54.46 J4.3 39.83,54.56 35.15,59.23 29.16,59.23 28.45,58.52 R19.2
N$23
  Top 0.254: R30.1 67.26,42.37 67.46,42.57 71.12,42.57 R29.2
N$24
  Top 0.254: R22.1 28.04,45.41 27.13,46.33 20.52,46.33 19.1,47.75 19.1,49.78 18.8,49.78 18.19,50.39 18.19,51.61 28.14,51.61 R21.2
N$25
  Top 0.254: R23.2 14.83,56.39 14.83,53.95 R24.1 14.94,53.85 15.04,53.75 20.32,53.75 20.52,53.54 23.77,53.54 24.79,54.56 J5.3
N$26
  Top 0.254: 67.36,33.02 U8.4 67.36,33.12 67.36,35.05 67.77,35.05 C13.1
N$27
  Top 0.254: R25.2 12.5,49.48 12.5,51.82 R26.1
N$28
  Top 0.356: C19.1 53.34,36.07 53.44,35.97 55.78,35.97 U9.7
N$29
  Top 0.356: C18.1 71.53,19.71 71.53,16.05 Q2.1 71.42,16.15 68.07,16.15 67.56,16.66 R31.1
N$30
  Top 0.356: C19.2 53.34,38 54.15,37.19 55.78,37.19 U9.6
N$31
  Top 0.356: Q2.3 73.86,15.14 73.86,19 73.97,19 D8.A 74.07,19.1 72.34,20.83 72.24,20.83 71.53,21.54 C18.2
N$32
  Top 0.254: Q1.3 44.91,35.87 45.92,36.88 50.19,36.88 52.43,39.12 57.1,39.12 57.61,39.62 61.67,39.62 62.89,40.84 69.19,40.84 73.66,36.37 74.88,36.37 R27.1
N$33  (via drill 0.61)
  Top 0.254: X2.2 17.27,18.69 19.61,21.03 19.61,22.55 19.81,22.55 C24.1 20.02,22.66 20.62,22.66 v21.44,23.47 | v20.83,29.36 20.83,27.94 U1.7
  Bottom 0.254: v20.83,29.36 21.44,28.75 v21.44,23.47
N$34
  Top 0.254: 59.54,35.87 57.51,35.87 57.51,32.82 R37.1 | 59.54,35.87 60.96,35.87 U9.2 | C27.1 63.7,39.73 63.09,39.12 59.74,39.12 59.54,38.91 59.54,35.87
N$35
  Top 0.254: U1.8 21.64,27.84 21.64,26.72 22.96,25.4 23.57,25.4 C15.1 23.37,25.3 23.37,20.02 22.05,18.69 X2.1
N$36
  Top 0.254: D9.A 17.48,3.76 18.49,2.74 27.13,2.74 30.18,5.79 30.18,11.28 29.57,11.28 28.96,11.89 28.96,14.53 40.84,14.53 U10.21
N$37  (via drill 0.61)
  Top 0.254: v25.5,4.06 24.49,4.06 24.18,3.76 D10.C | v25.5,5.89 24.49,6.91 24.18,6.91 R34.1
  Bottom 0.254: v25.5,4.06 v25.5,5.89
N$38  (via drill 0.61)
  Top 0.254: v22.76,5.08 22.05,5.08 22.05,3.76 D10.A | v29.87,12.19 40.84,12.19 U10.19
  Bottom 0.254: v22.76,5.08 v29.87,12.19
N$39
  Top 0.254: R35.1 45.41,15.85 40.95,15.85 U10.22
N$40
  Top 0.254: Q5.3 48.26,38 45.82,38 Q1.1 45.72,37.9 44.7,36.88 43.99,36.88 43.99,36.58 42.06,34.65 40.23,34.65 40.23,32 R42.2
N$41  (via drill 0.61)
  Top 0.254: v36.68,38 37.9,38 Q3.3 | v45.41,39.42 45.62,39.62 56.9,39.62 57.91,40.64 R15.1
  Bottom 0.254: v36.68,38 45.41,38 v45.41,39.42
N$42
  Top 0.254: R43.2 35.66,32 36.78,33.12 36.98,33.12 36.98,35.87 Q3.1 37.08,35.97 38.1,36.98 39.52,36.98 39.73,36.78 40.34,36.78 41.35,35.76 Q6.3
PWREN~
  Top 0.356: 64.11,11.28 65.33,11.28 R32.2 | 64.11,11.28 59.03,11.28 58.62,10.87 U2.14 | R31.2 67.46,14.73 64.11,11.38 64.11,11.28
RST  (via drill 0.61)
  Top 0.254: v17.37,29.57 18.29,29.57 18.29,27.94 U1.4 | v9.45,38.1 8.53,37.19 8.53,35.05 9.45,35.05 | 9.45,35.05 10.87,35.05 R1.1 | v9.45,34.95 9.45,35.05
  Bottom 0.254: v17.37,29.57 16.66,30.28 16.66,37.29 15.85,38.1 v9.45,38.1 | v9.45,34.95 9.45,32.61 8.94,32.11 8.94,18.69 5.59,15.34 JP1.5
RX1  (via drill 0.61)
  Top 0.254: v29.97,21.64 27.74,21.64 27.74,24.79 25.2,27.33 24.59,27.33 24.08,27.84 U1.11
  Bottom 0.254: v29.97,21.64 28.14,21.64 28.14,14.83 20.02,6.71 14.43,6.71 U13.P$3
RX-BT
  Top 0.254: U10.14 40.95,6.3 41.25,6.6 41.76,6.6 43.38,8.23 45.11,8.23 46.33,9.45 JP2.5
SCK  (via drill 0.61)
  Top 0.254: U3.SCK 12.19,13.11 11.89,12.8 5.59,12.8 JP1.3 | v18.09,26.42 17.68,26.82 17.68,27.84 U1.3 | v15.75,36.98 v17.88,36.98
  Bottom 0.254: v18.09,26.42 18.29,26.62 18.29,34.75 17.88,35.15 v17.88,36.98 | v15.75,36.98 13.11,36.98 13.01,37.08 10.36,37.08 10.36,27.23 9.45,26.31 9.45,16.66 5.59,12.8 JP1.3
SCL  (via drill 0.61)
  Top 0.254: v11.58,47.95 10.16,47.95 U4.P$6 | v19.1,58.42 19.3,58.22 v26.62,58.22 | v22.45,36.27 23.27,35.46 25.6,35.46 25.7,35.36 U1.19 25.81,35.26 25.91,35.15 29.46,35.15 30.58,34.04 30.58,29.97 33.02,29.97 R3.1 33.12,29.87 39.52,29.87 41.45,27.94 41.55,27.94 | 51.51,29.46 51,29.46 50.7,29.77 44.81,29.77 44.6,29.97 43.59,29.97 41.55,27.94 | 51.51,29.46 56.19,29.46 56.9,30.18 63.3,30.18 63.3,26.11 U6.P5 | 41.55,27.94 41.55,26.62 43.28,26.62 U5.14 | v51.31,23.88 52.53,23.88 52.93,23.47 U11.6 | 51.51,29.46 v51.51,29.36
  Bottom 0.254: v11.58,47.95 19.1,55.47 v19.1,58.42 | v26.62,58.22 27.84,57 27.84,52.83 25.7,50.7 25.7,42.47 22.45,39.22 v22.45,36.27 | v51.31,23.88 51.51,24.08 v51.51,29.36
SDA  (via drill 0.61)
  Top 0.254: U1.20 25.81,36.07 32.82,36.07 32.92,36.17 R2.1 33.12,36.27 v34.54,34.85 | U6.P6 62.69,26.01 61.77,25.09 61.47,25.09 59.54,23.16 59.54,20.52 55.98,20.52 55.58,20.12 54.46,20.12 53.03,21.54 53.03,22.05 U11.7 52.83,22.15 51.82,22.15 v48.77,25.2 | v42.47,27.64 43.38,27.64 U5.13 | v36.37,11.28 26.72,1.63 8.94,1.63 8.94,4.88 5.59,8.23 1.42,8.23 1.42,33.02 4.06,35.66 5.18,35.66 5.18,39.01 4.47,39.73 2.85,39.73 2.85,43.99 4.78,45.92 8.64,45.92 10.06,47.35 U4.P$5
  Bottom 0.254: 43.38,27.64 48.77,27.64 v48.77,25.2 | 43.38,27.64 v42.47,27.64 42.47,29.77 38.81,29.77 35.26,33.33 35.26,34.14 v34.54,34.85 | v36.37,11.28 43.38,18.29 43.38,27.64
START-BUTTON  (via drill 0.61)
  Top 0.254: v19.1,35.15 18.8,35.15 16.66,33.02 14.33,33.02 14.22,32.92 U1.40 | v19.81,41.76 19.81,44.4 12.9,44.4 12.39,44.91 8.74,44.91 7.11,43.28 4.37,43.28 4.06,43.59 SW1.1
  Bottom 0.254: v19.1,35.15 19.1,41.05 v19.81,41.76
START-LED  (via drill 0.61)
  Top 0.254: v7.01,41.25 7.11,41.25 8.13,40.23 D6.C | v55.98,32.92 55.98,29.97 54.66,29.97 54.36,30.28 45.82,30.28 42.67,33.43 v41.15,33.43 | v35.76,36.07 35.76,37.9 28.35,37.9 v28.25,37.8 | v24.28,31.9 24.79,31.39 25.7,31.39 U1.14
  Bottom 0.254: v7.01,41.25 10.67,44.91 10.67,51.41 16.56,57.3 16.56,58.83 17.37,59.64 39.12,59.64 39.12,49.48 44.6,43.99 48.26,43.99 48.26,43.89 49.68,42.47 61.06,42.47 61.06,38 v55.98,32.92 | v41.15,33.43 36.98,33.43 36.98,34.85 v35.76,36.07 | v28.25,37.8 27.74,37.8 27.64,37.9 25.2,37.9 25.2,32.82 v24.28,31.9
STOP-BUTTON
  Top 0.254: U1.41 14.12,32.11 13.92,32.31 12.6,32.31 11.18,33.73 4.37,33.73 4.06,34.04 SW2.1
STOP-LED  (via drill 0.61)
  Top 0.254: v7.01,30.89 7.11,30.89 8.13,29.87 D5.C | v19.51,52.63 29.06,52.63 v30.58,51.1 | v29.16,34.24 27.03,32.11 25.81,32.11 U1.15
  Bottom 0.254: v7.01,30.89 8.53,32.41 8.53,41.66 v19.51,52.63 | v30.58,51.1 30.58,35.66 v29.16,34.24
TX1  (via drill 0.61)
  Top 0.254: v26.72,28.75 25.81,29.67 U1.12 | v26.72,22.25 25.81,21.34 25.81,20.12 v29.06,20.12
  Bottom 0.254: v26.72,22.25 v26.72,28.75 | v29.06,20.12 28.65,19.71 28.65,14.63 18.69,4.67 14.43,4.67 U13.P$2
TX-BT
  Top 0.254: U10.13 40.95,5.08 41.35,5.49 43.18,5.49 43.38,5.69 46.84,5.69 47.65,6.5 47.65,10.67 45.01,10.67 43.89,9.55 JP2.6
UNSWPWR
  Top 0.356: D8.C 74.07,22.86 74.07,25.5 74.78,25.5 SW4.2 74.98,25.6 76.61,27.23 79.45,27.23 81.79,29.57 90.02,29.57 90.02,34.34 89.71,34.65 87.48,34.65 87.48,39.83 84.33,42.98 D7.C
VBATT  (via drill 0.61)
  Top 0.356: U4.P$3 5.79,48.06 4.98,48.06 4.67,48.36 4.67,51.31 4.98,51.31 C26.1 5.18,51.41 5.49,51.71 v6.5,51.71 | J7.POS 88.7,46.13 84.94,46.13 84.33,46.74 D7.A 84.12,46.84 81.28,49.68 40.13,49.68 v40.03,49.78
  Bottom 0.356: v6.5,51.71 6.5,53.24 14.12,60.86 40.03,60.86 v40.03,49.78
VINPUT  (via drill 0.61)
  Top 0.356: v10.87,26.52 10.06,26.52 9.35,27.23 R5.2 | 70.71,31.39 70.21,31.39 70,31.19 U8.1 69.8,31.19 68.89,31.19 68.07,32 65.53,32 63.91,33.63 C16.1 63.7,33.73 63.09,34.34 61.06,34.34 U9.1 | 70.71,31.39 70.92,31.6 70.92,32.92 70,32.92 U8.3 | 70.71,31.39 72.54,29.57 72.54,25.6 71.02,25.6 SW4.3 | U9.1 61.16,34.65 62.28,34.65 62.38,34.75 62.59,34.75 62.59,36.27 62.28,36.58 61.57,36.58 61.06,37.08 U9.3 | R37.2 59.33,32.82 60.96,34.44 U9.1
  Bottom 0.356: v10.87,26.52 11.28,26.11 11.28,4.17 13.92,1.52 51.31,1.52 51.31,14.63 57.91,21.23 68.17,21.23 68.17,21.74 70.92,24.49 70.92,25.5 SW4.3
VOLT  (via drill 0.61)
  Top 0.254: R5.1 9.35,25.4 13.21,25.4 R4.2 13.31,25.5 14.53,25.5 v14.83,25.81 | v15.75,35.15 14.33,35.15 14.22,35.26 U1.37
  Bottom 0.254: v15.75,35.15 14.83,34.24 v14.83,25.81
(copper drawn outside any net)
  shapes: $+3v3 area x2, $gnd area x1

## Text on the board
tPlace: 2 | 3 | 1 | 4 | PWR | START | STOP | U10 | CLEAR | PINPoint 4 | beta 4 | GND | BLUETOOTH | RN-41 | BT | JP2 | 3v3 | BT | TALK | GPS | FTDI | XMIT | GND 3.3 5
bPlace: The PINPoint Data Collector | UMASS LOWELL | part of iSENSEproject.org | MACHINE SCIENCE | GPS OUTLINE | Mosquito